# Altium PCB HV Box Connector Board.PcbDoc
Units mil, origin at the board's own origin, x right, y up, seen from the top; angles counter-clockwise.
Board outline 3937.01 x 3149.61 mil, 2 copper layers (Top Layer, Bottom Layer), stack 61.756 mil thick; 37 components, 41 nets, 144 pads, 416 vias.
Unrouted connection lines stored in the file: 1.
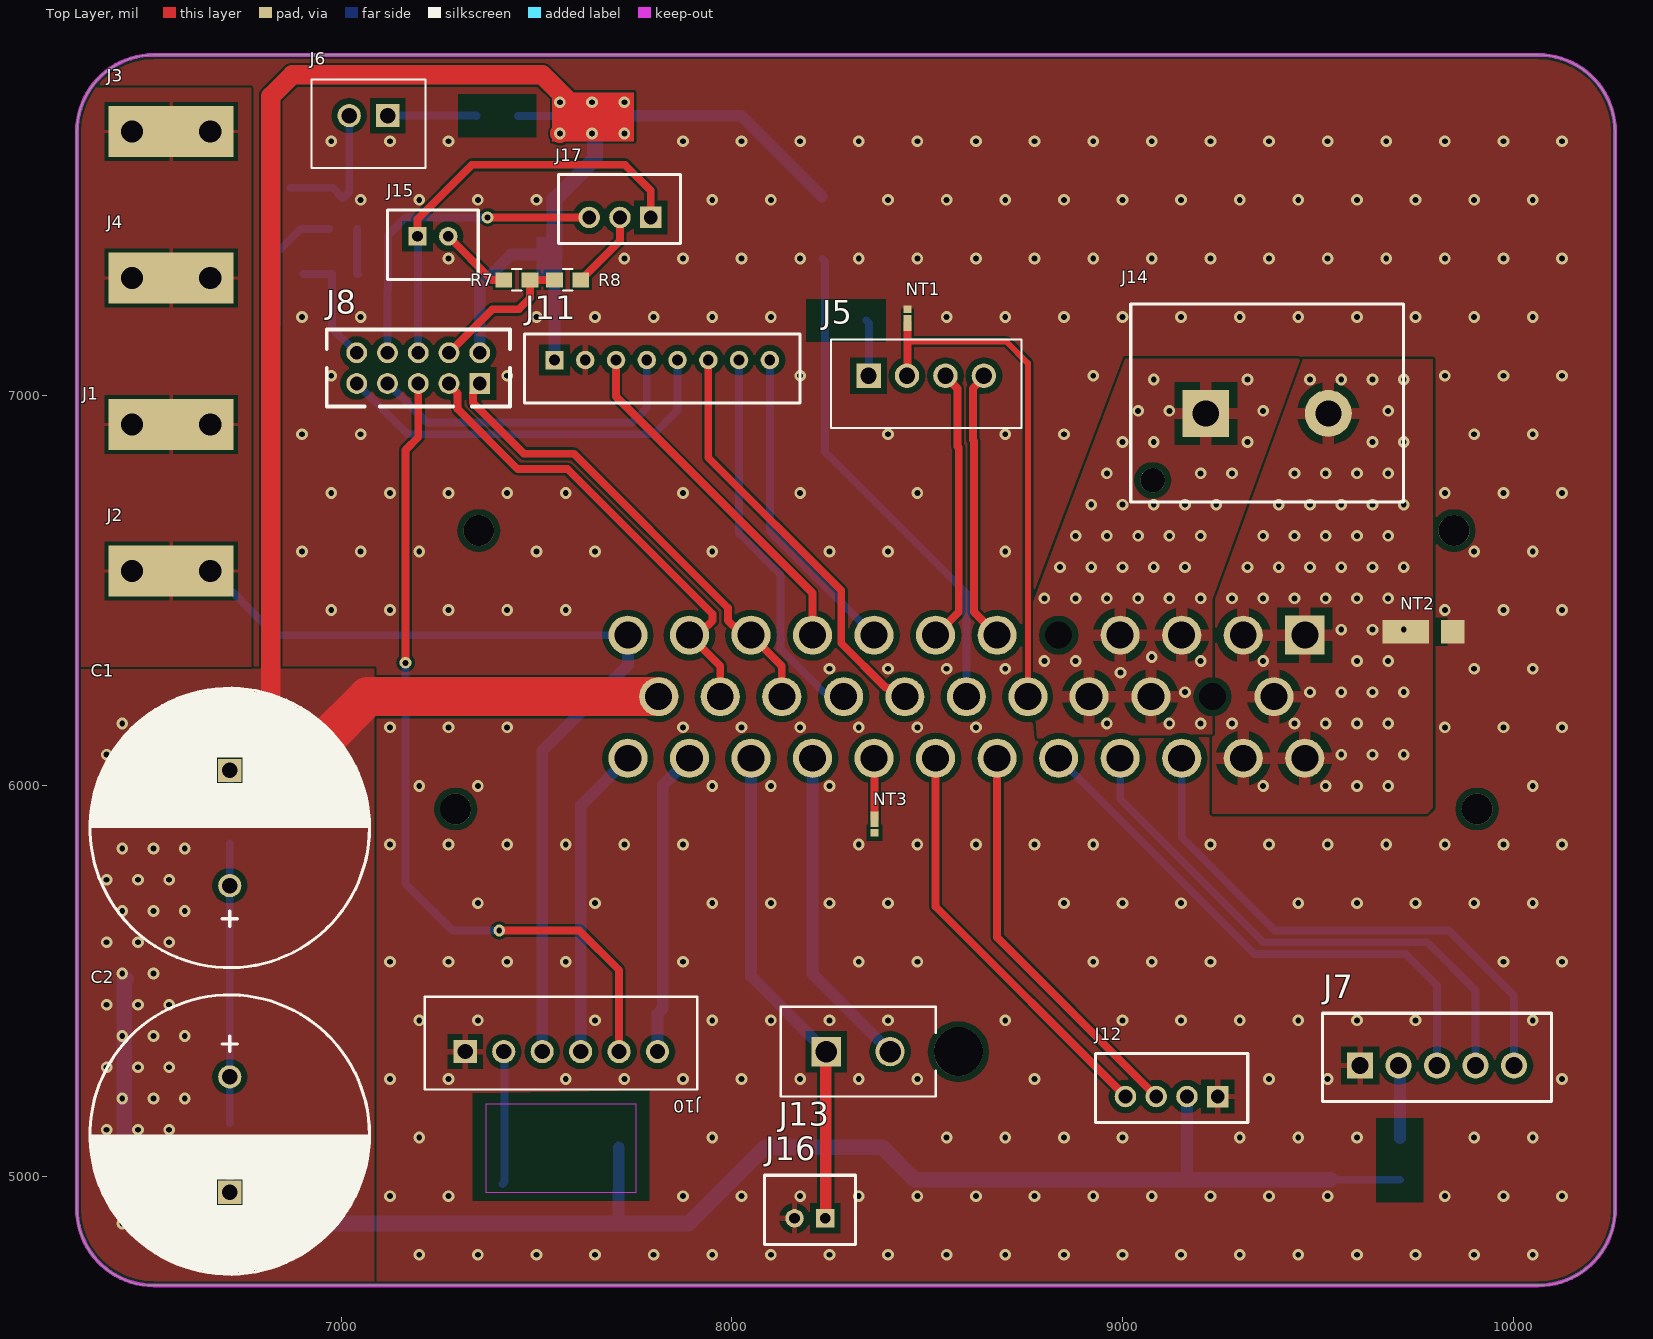
[diagram p0: Top Layer view]
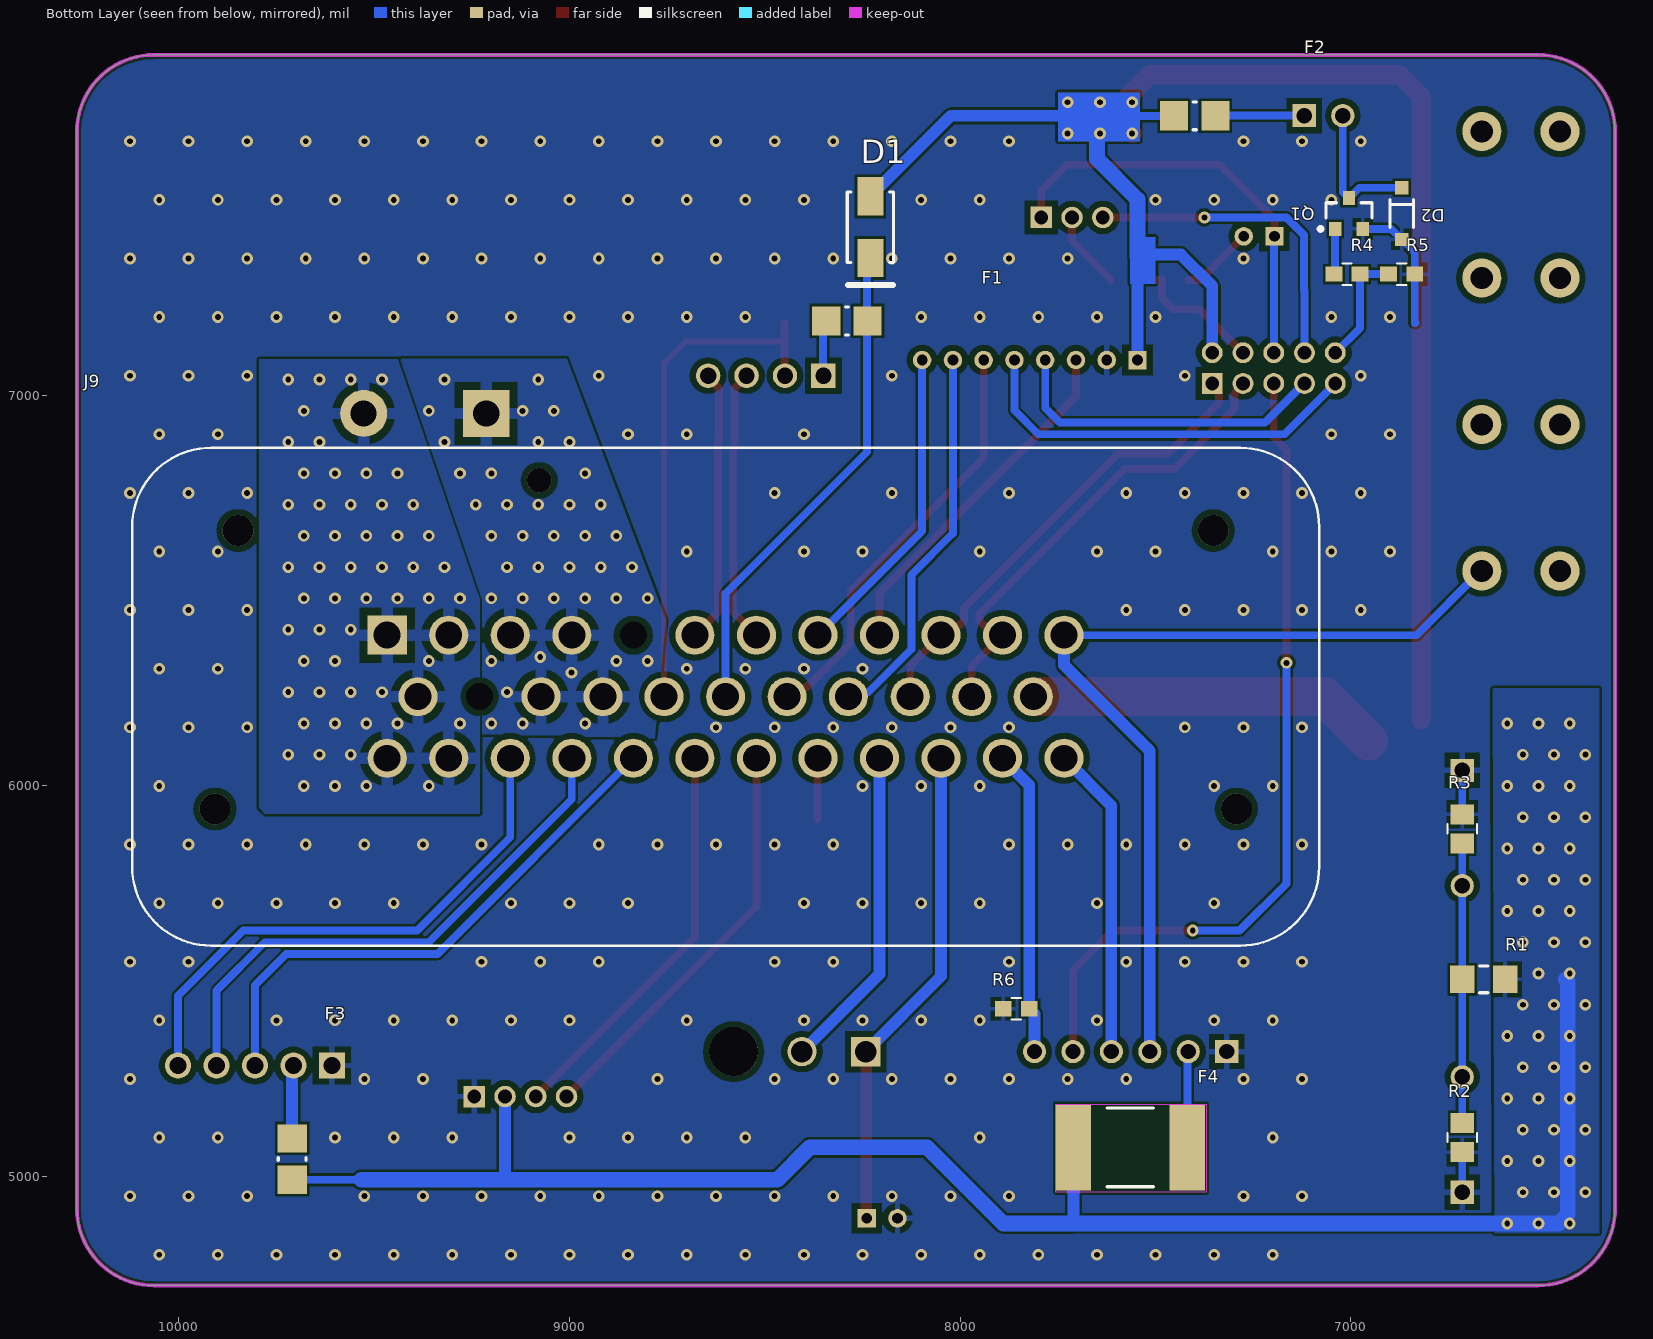
[diagram p1: Bottom Layer view, seen from below]
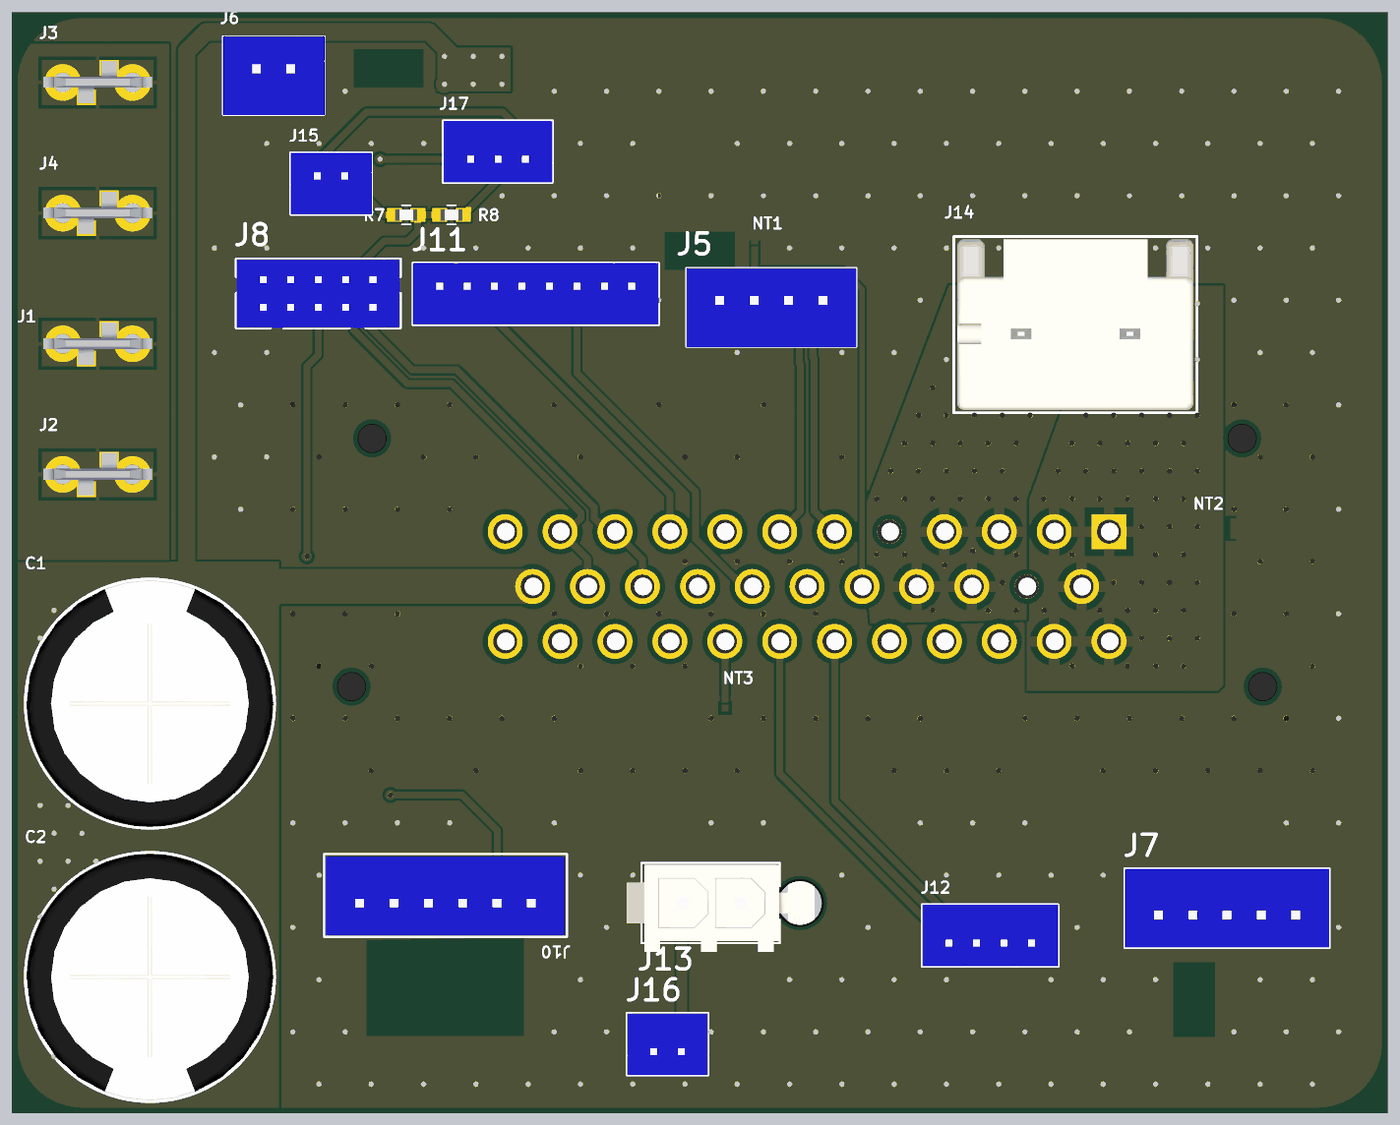
[diagram p2: 3D render of the assembled board from above, using the file's embedded part models]
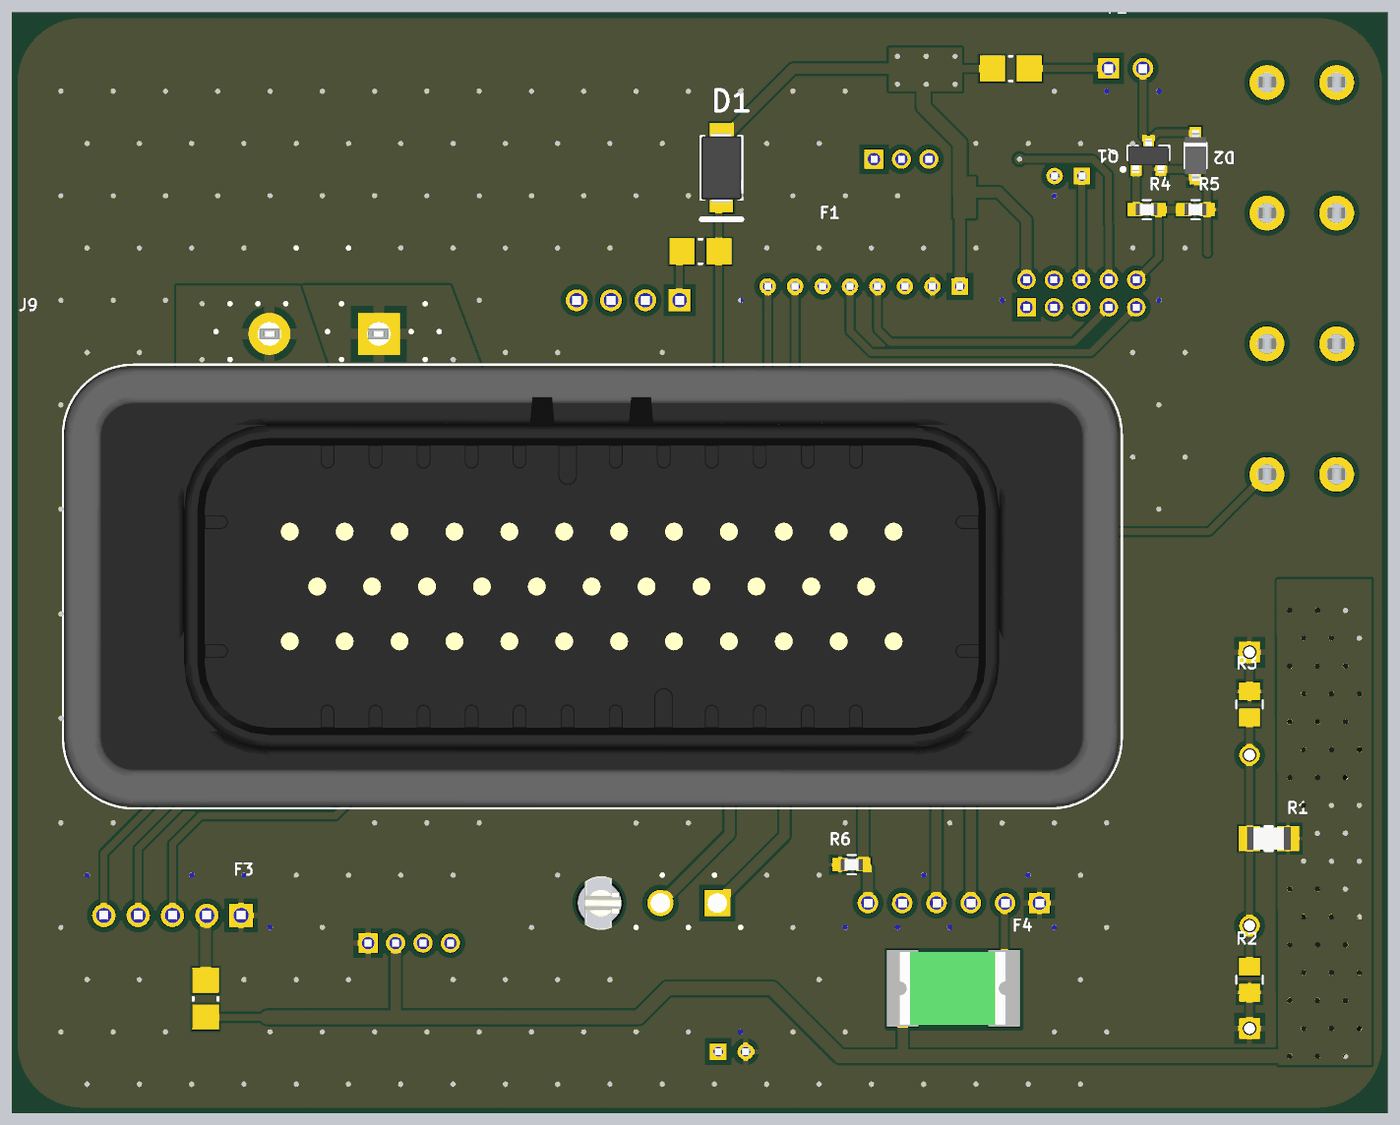
[diagram p3: 3D render of the assembled board from below, using the file's embedded part models]

## Layer stack, top to bottom
Top Solder: solder mask 1, SM-001, Dk 4
Top Layer: signal copper 1.378
Dielectric 1: core 59, Core-043, Dk 4.3
Bottom Layer: signal copper 1.378
Bottom Solder: solder mask 1, SM-001, Dk 4

## Board outline
6323.82,4918.31 ccw(c6520.67,4918.31) 6520.67,4721.46 10063.98,4721.46 ccw(c10063.98,4918.31) 10260.83,4918.31 10260.83,7674.21 ccw(c10063.98,7674.21) 10063.98,7871.06 6520.67,7871.06 ccw(c6520.67,7674.21) 6323.82,7674.21

## Design rules (kind name [scope] priority, off if disabled: settings)
AcuteAngle [All] p1: minimum=6.00000000000000E+0001 checktracksonly=FALSE
AssemblyTestPointUsage [All] p1: valid=2
AssemblyTestpoint [All] p1: testpointundercomponent=TRUE minsize=30 maxsize=100 preferedsize=60 minholesize=0 maxholesize=40 preferedholesize=32 testpointgrid=1 usegrid=FALSE gridtolerance=0.01 allowsidetop=TRUE allowsidebottom=TRUE
Clearance Clearance_1 [IsStitchingVia vs (OnLayer('Top Overlay'))] p1: gap=6 ignorepadtopadclearanceinfootprint=FALSE except(0: Arc-Hole Track-Hole SMDPad-Hole THPad-Hole Via-Hole Fill-Hole Poly-Hole Region-Hole Text-Hole; 10: Arc-THPad Arc-Text Track-THPad Track-Text SMDPad-THPad SMDPad-Text THPad-THPad THPad-Text Fill-Text Poly-Text Region-Text Text-Text; 15: Via-Text)
Clearance [All] p2: gap=6 ignorepadtopadclearanceinfootprint=FALSE except(0: Arc-Hole Track-Hole SMDPad-Hole THPad-Hole Via-Hole Fill-Hole Poly-Hole Region-Hole Text-Hole; 8: Via-Poly; 10: Arc-THPad Arc-Text Track-THPad Track-Text SMDPad-THPad SMDPad-Text THPad-THPad THPad-Via THPad-Fill THPad-Region THPad-Text Via-Text Fill-Text Poly-Text Region-Text Text-Text; 15: THPad-Poly)
ComponentClearance [All vs NOT HasFootprint('20MIL_TIE')] p1: gap=10 collisioncheckmode=3 verticalgap=10 showdistances=FALSE
DiffPairsRouting can [InDifferentialPairClass('CAN')] p1: maxlimit=19.08 minlimit=19.08 mostfreqgap=19.08 toplayer_minwidth=20 toplayer_maxwidth=20 toplayer_prefwidth=20 bottomlayer_minwidth=20 bottomlayer_maxwidth=20 bottomlayer_prefwidth=20 impedanceprofiledriven=TRUE impedanceprofileid={F46612D0-BBF3-4EEB-B16D-8B29CA681549} impedanceprofilevalue=120.000000 maxuncoupledlength=500
DiffPairsRouting [All] p2: maxlimit=10 minlimit=10 mostfreqgap=10 toplayer_minwidth=15 toplayer_maxwidth=15 toplayer_prefwidth=15 bottomlayer_minwidth=15 bottomlayer_maxwidth=15 bottomlayer_prefwidth=15 maxuncoupledlength=500
FabricationTestPointUsage [All] p1: valid=2 allowmultiple=FALSE
FabricationTestpoint [All] p1: side=3 testpointundercomponent=TRUE minsize=20 maxsize=100 preferedsize=60 minholesize=0 maxholesize=40 preferedholesize=32 testpointgrid=1 allowsidetop=TRUE allowsidebottom=TRUE usegrid=FALSE gridtolerance=0.01
Height [All] p1: minheight=0 maxheight=99999 prefheight=500
HoleSize [All] p1: absolutevalues=TRUE maxlimit=200 minlimit=7.87 maxpercent=80.000 minpercent=20.000
MinimumAnnularRing [All] p1: minimumring=3
MinimumSolderMaskSliver [All] p1: minsoldermaskwidth=1
PasteMaskExpansion PasteMaskExpansion_1 [IsSMTPin] p1: expansion=0
PasteMaskExpansion [All] p2: expansion=-1000
PolygonConnect PolygonConnect_1 [InPolygonClass('HIGHCUR')] p1: thpad.connectstyle=Relief thpad.reliefconductorwidth=30 thpad.reliefentries=4 thpad.polygonreliefangle="90 Angle" thpad.airgapwidth=20 smdpad.connectstyle=Relief smdpad.reliefconductorwidth=20 smdpad.reliefentries=4 smdpad.polygonreliefangle="90 Angle" smdpad.airgapwidth=15 via.connectstyle=Direct via.reliefconductorwidth=10 via.reliefentries=4 via.polygonreliefangle="90 Angle" via.airgapwidth=10 // HIGHCUR
PolygonConnect [All] p2: thpad.connectstyle=Relief thpad.reliefconductorwidth=15 thpad.reliefentries=4 thpad.polygonreliefangle="90 Angle" thpad.airgapwidth=15 smdpad.connectstyle=Relief smdpad.reliefconductorwidth=10 smdpad.reliefentries=4 smdpad.polygonreliefangle="90 Angle" smdpad.airgapwidth=10 via.connectstyle=Direct via.reliefconductorwidth=10 via.reliefentries=4 via.polygonreliefangle="90 Angle" via.airgapwidth=10
RoutingVias [Not InAnyComponent] p1: holewidth=15 width=30 viastyle="Through Hole" minholewidth=8.27 minwidth=15.75 maxholewidth=50 maxwidth=100
SMDToCorner [All] p1: distance=10000
SMDToPlane [All] p1: distance=200000
SilkToSolderMaskClearance [IsPad     or IsVia] p1: minsilkscreentomaskgap=1.8 clearancetoexposedcopper=TRUE
SolderMaskExpansion Via [IsVia] p1: expansion=4 istentingtop=TRUE
SolderMaskExpansion [All] p2: expansion=2.5 istentingtop=FALSE
Width Width_1 [InNetClass('PWR')] p1: maxlimit=80 minlimit=10 preferedwidth=20 minimp=50.000000 maximp=50.000000 favimp=50.000000
Width [All] p2: maxlimit=100 minlimit=8 preferedwidth=10 minimp=50.000000 maximp=50.000000 favimp=50.000000
19 further rules are at their usual default settings.

## Classes and differential pairs
polygon class HIGHCUR: +DCDC_L01_P001 +DCDC_L02_P006 PGND_L01_P007 PGND_L02_P000
net class MED_CUR: +GLV GND SHDN_IN SHDN_OUT
net class HIGH_CUR: +DCDC PGND
differential pair class CAN: CAN EM_D
differential pair CAN: +CAN_P -CAN_N
differential pair EM_D: +EM_D_P -EM_D_N

## Components (designator, comment, footprint, x,y, rotation, side; value= is the part's Value field where it differs from the comment)
C1 "URS1E222MHD" Nichicon_18x15 6715,6040 r270 top
C2 "URS1E222MHD" Nichicon_18x15 6715,4960 r90 top
D1 "B340A-13-F" DIOD-SMA-2_V 8230,7430 r270 bottom
D2 "1N4148W-E3-08" Vishay_1N4148W-E3-08 6870,7465 r270 bottom
F1 "610 mA PTC" 1206_FUSE_40H 8290,7190 r0 bottom
F2 "610 mA PTC" 1206_FUSE_40H 7400,7715 r180 bottom
F3 "610 mA PTC" 1206_FUSE_40H 9710,5045 r90 bottom
F4 "0ZCF0200AF2C" Bel_0ZCF0200AF2C_0 7565,5075 r180 bottom
J1 "1217861-1" te-1217861-1 6565,6925 r270 top
J2 "1217861-1" te-1217861-1 6565,6550 r270 top
J3 "1217861-1" te-1217861-1 6565,7675 r270 top
J4 "1217861-1" te-1217861-1 6565,7300 r270 top
J5 "B4B-XH-A(LF)(SN)" B4B-XH-A(LF)(SN) 8350,7050 r0 top
J6 "B2B-XH-A(LF)(SN)" B2B-XH-A(LF)(SN) 7070,7695 r180 top
J7 "B5B-XH-A(LF)(SN)" JST_B5B-XH-A_LF_SN_0 9805,5305 r0 top
J8 "B10B-PHDSS(LF)(SN)" B10B-PHDSS 7355,7030 r0 top
J9 "1-776231-1" TE_1-776231-1 9466.54,6385.83 r180 bottom locked
J10 "B6B-XH-A(LF)(SN)" CONN_B6B-XH-A(LF 7810,5320 r0 top
J11 "B8B-PH-K-S(LF)(SN)" B8B-PH-K 7821.85,7068.35 r180 top
J12 "B4B-PH-K-S(LF)(SN)" B4B-PH-K 9125.63,5226.65 r0 top
J13 "1-770872-0" CON2_1X2_P163_VM 8242.01,5320 r0 top value=Value
J14 "DF22-2P-7.92DSA(05)" DF22-2P-7.92DSA_05_0 9370,6980 r180 top
J15 "B2B-PH-K-S(LF)(SN)" JST_Sales_America_Inc._B2B-PH-K-S_LF_SN_0 7235,7385 r270 top
J16 "B2B-PH-K-S(LF)(SN)" JST_Sales_America_Inc._B2B-PH-K-S_LF_SN_0 8200,4915 r90 top
J17 "B3B-PH-K-S(LF)(SN)" B3B-PH-K 7713.74,7474.69 r0 top
NT1 "NET TIE" 20MIL_TIE 8450,7220 r270 top net-tie
NT2 "NET TIE" 60MIL_TIE 9845,6395 r180 top net-tie
NT3 "NET TIE" 20MIL_TIE 8365,5880 r90 top net-tie
Q1 "DMN3404L-7" SOT23-FET-DI 7005,7465 r90 bottom
R1 "RES 1206 2 1%" 1206_RES_28H 6660,5505 r180 bottom value=2
R2 "RES 0805 10M 1%" 0805_RES 6715,5100 r90 bottom value=10M
R3 "RES 0805 10M 1%" 0805_RES 6715,5890 r270 bottom value=10M
R4 "RES 0603 1K 1%" 0603_RES 7010,7310 r0 bottom value=1K
R5 "RES 0603 10K 1%" 0603_RES 6870,7310 r0 bottom value=10K
R6 "RES 0603 2.2K 1%" 0603_RES 7856.54,5430 r0 bottom value=2.2K
R7 "RES 0603 0 5%" 0603_RES 7450,7295 r180 top value=0
R8 "RES 0603 0 5%" 0603_RES 7580,7295 r180 top value=0

## Footprints (in the part's own frame and the unit in brackets; to place one, negate y for a bottom-side part, rotate by r counter-clockwise, add the part's x,y. Pads: shape width x height; smd on the part's side, far side on the other; paste and mask are expansions set on the pad)
20MIL_TIE [mil]
  rect 20x20 smd paste-100 mask-100: 1(0,0)
  rect 40x20 smd paste-100 mask-100: 2(35,0)
60MIL_TIE [mil]
  rect 60x60 smd paste-1000 mask+4: 1(0,0)
  rect 120x60 smd paste-1000 mask+4: 2(120,0)
0603_RES [mil]
  rect 43x39 smd: 1(-33.46,0) 2(33.46,0)
  silkscreen extent -12,-28 12,28, body extent -32,-19 32,19, height 34
0805_RES [mm]
  rect 1.3x1.5 smd: 1(-0.95,0) 2(0.95,0)
  silkscreen extent -0.3,-0.97 0.3,0.97, body extent -1.09,-0.7 1.09,0.7, height 1.1
1206_FUSE_40H [mil]
  rect 72x75 smd: 1(-53,0) 2(53,0)
  silkscreen extent -4,-35 4,35, body extent -69,-35 69,35, height 40
1206_RES_28H [mm]
  rect 1.6x1.8 smd: 1(-1.4,0) 2(1.4,0)
  silkscreen extent -0.27,-0.88 0.27,0.88, body extent -1.6,-0.83 1.6,0.83, height 0.71
B2B-XH-A(LF)(SN) [mm]
  rect 1.508x1.508 hole 1: 1(-1.25,-0.525)
  round 1.508 hole 1: 2(1.25,-0.525)
  silkscreen extent -3.7,-2.88 3.7,2.88, body extent -3.7,-2.87 3.7,2.88, height 7
B3B-PH-K [mm]
  rect 1.4x1.4 hole 0.9 paste-1000: 1(2,-0.5)
  round 1.4 hole 0.9 paste-1000: 2(0,-0.5) 3(-2,-0.5)
  silkscreen extent -4,-2.2 3.95,2.3, body extent -3.95,-2.2 3.95,2.3, height 6
B4B-PH-K [mm]
  rect 1.4x1.4 hole 0.9 paste-1000: 1(3,-0.55)
  round 1.4 hole 0.9 paste-1000: 2(1,-0.55) 3(-1,-0.55) 4(-3,-0.55)
  silkscreen extent -4.95,-2.25 4.95,2.25, body extent -4.95,-2.25 4.95,2.25, height 6
B4B-XH-A(LF)(SN) [mm]
  rect 1.59x1.59 hole 1.06 paste-25.4: 1(0,0)
  round 1.59 hole 1.06 paste-25.4: 2(2.5,0) 3(5,0) 4(7.5,0)
  silkscreen extent -2.45,-3.4 9.95,2.35, body extent -2.45,-3.4 9.95,2.35, height 7
B8B-PH-K [mm]
  rect 1.2x1.2 hole 0.7 paste-1000: 1(7,-0.55)
  round 1.2 hole 0.7 paste-1000: 2(5,-0.55) 3(3,-0.55) 4(1,-0.55) 5(-1,-0.55) 6(-3,-0.55) 7(-5,-0.55) 8(-7,-0.55)
  silkscreen extent -8.95,-2.25 8.95,2.25, body extent -8.95,-2.25 8.95,2.25, height 6
B10B-PHDSS [mm]
  rect 1.35x1.35 hole 0.9: 1(0,0)
  round 1.35 hole 0.9: 2(0,2) 3(-2,0) 4(-2,2) 5(-4,0) 6(-4,2) 7(-6,0) 8(-6,2) 9(-8,0) 10(-8,2)
  silkscreen extent -9.95,-1.5 1.98,3.5, body extent -9.95,-1.5 1.95,3.5, height 6.5
Bel_0ZCF0200AF2C_0 [mm]
  rect 2.3x5.6 smd paste+0: 1(-3.7,0) 2(3.7,0)
  Keep-Out Layer region: -4.826,2.794 4.953,2.794 4.953,-2.921 -4.826,-2.921
  silkscreen extent -1.5,-2.56 1.5,2.56, body extent -3.89,-2.65 3.81,2.65, height 1
CON2_1X2_P163_VM [mil]
  rect 75x75 hole 55: 1(0,0)
  round 75 hole 55: 2(162.99,0)
  round 125 hole 125 unplated mask+6.5: 3(338,0)
  silkscreen extent -117,-115 280,115, body extent -159,-140 380,110, height 566
CONN_B6B-XH-A(LF [mil]
  rect 59x59 hole 39: 1(-492.13,0)
  round 59 hole 39: 2(-393.7,0) 3(-295.28,0) 4(-196.85,0) 5(-98.43,0) 6(0,0)
  silkscreen extent -596,-97 101,141, body extent -590,-94 95,133, height 276
DF22-2P-7.92DSA_05_0 [mm]
  rect 3.048x3.048 hole 1.7 paste-1000 mask+0: 1(3.985,0.675)
  round 3.048 hole 1.7 paste-1000 mask+0: 2(-3.985,0.675)
  round 1.6 hole 1.6 unplated paste-1000 mask+0: M1(7.435,5.025)
  silkscreen extent -8.86,-6.43 8.86,6.43, body extent -8.61,-6.23 8.61,6.22, height 18.12
DIOD-SMA-2_V [mm] "Molded Diode, 2-Leads, Body 4.6x2.92mm"
  rect 2.5x1.7 smd: 1(-2,0) 2(2,0)
  silkscreen extent -2.3,-1.5 3.75,1.5, body extent -2.52,-1.46 2.52,1.46, height 2.4
JST_B5B-XH-A_LF_SN_0 [mm]
  rect 1.7x1.7 hole 1.1 paste-1000: 1(-5,-0.525)
  round 1.7 hole 1.1 paste-1000: 2(-2.5,-0.525) 3(0,-0.525) 4(2.5,-0.525) 5(5,-0.525)
  silkscreen extent -7.45,-2.88 7.45,2.88, body extent -7.45,-2.87 7.45,2.88, height 7
JST_Sales_America_Inc._B2B-PH-K-S_LF_SN_0 [mm]
  rect 1.2x1.2 hole 0.7 paste-1000: 1(-0.55,-1)
  round 1.2 hole 0.7 paste-1000: 2(-0.55,1)
  silkscreen extent -2.25,-2.95 2.25,2.95, body extent -2.25,-2.95 2.25,2.95, height 6
Nichicon_18x15 [mm]
  round 1.5 hole 1: 1(7.5,0)
  rect 1.5x1.5 hole 1: 2(0,0)
  silkscreen extent -5.33,-9.08 12.83,9.08, body extent -5.25,-9 12.75,9, height 15.02
SOT23-FET-DI [mm] "SOT23, 3-Leads, Body 2.90x2.40mm, Pitch 0.90mm, IPC Medium Density"
  rect 0.9x0.8 smd: 1(-1,0.9) 2(-1,-0.9) 3(1,0)
  silkscreen extent -1.12,-1.5 0.7,1.98, body extent -1.25,-1.5 1.25,1.5, height 1.1
te-1217861-1 [mil]
  round 100 hole 57: 1a(0,100) 1c(0,-100)
  rect 130x320 smd paste-39370.1 mask+4: 1b(0,0)
  body extent -61,-156 60,156, height 415
TE_1-776231-1 [mm]
  rect 2.54x2.54 hole 1.753 mask+0: 1(0,0)
  round 2.54 hole 1.753 mask+0: 2(4,0) 3(8,0) 4(12,0) 6(20,0) 7(24,0) 8(28,0) 9(32,0) 10(36,0) 11(40,0) 12(44,0) 13(2,-4) 15(10,-4) 16(14.025,-4) 17(18,-4) 18(22,-4) 19(26,-4) 20(29.975,-4) 21(34,-4) 22(38,-4) 23(42,-4) 24(0,-8) 25(4,-8) 26(8,-8) 27(12,-8) 28(16,-8) 29(20,-8) 30(24,-8) 31(28,-8) 32(32,-8) 33(36,-8) 34(40,-8) 35(44,-8)
  round 1.27 hole 1.753 mask+0: 5(16,0) 14(6,-4)
  round 2.007 hole 2.007 unplated: M1(-9.7,6.8) M2(53.7,6.8) M3(55.2,-11.3) M4(-11.2,-11.3)
  silkscreen extent -16.58,-20.18 60.58,12.18, body extent -16.5,-20.05 60.4,12.05, height 34.25
Vishay_1N4148W-E3-08 [mm]
  rect 0.85x0.85 smd: A(1.675,0) K(-1.675,0)
  silkscreen extent -0.9,-0.77 0.9,0.77, body extent -1.85,-0.77 1.85,0.77, height 1.26

## Part data
C1 C2: "2200µF 25V Aluminum Electrolytic Capacitors Radial, Can  2000 Hrs @ 85°C", Capacitance=2.2mF, Case/Package=Radial, Dielectric Material=Aluminium, Leakage Current=1.65mA, Manufacturer=Nichicon, Max Operating Temperature=85°C, Min Operating Temperature=-40°C, Package Quantity=50, Ripple Current=1.36A, Supplier Part Number 1=493-15903-ND, Tolerance=20%, Voltage Rating=25V, Category="Aluminum Electrolytic Capacitors", Diameter=18mm, Dissipation Factor=0.16%, Height=15mm, Height - Seated (Max)=0.65inch, Lead Diameter=0.8mm, Lead Free="Lead Free", Lead Pitch=7.5mm, Length=15mm, Life (Hours)=2000Hour, Manufacturer Part Number=URS1E222MHD, Mount="Through Hole", Number of Pins=2, Packaging=Bulk, Radiation Hardening=No, Supplier 1=Digi-Key, Termination=Radial, Voltage Rating (DC)=25V
D1: library part CMP-1667-00003-1, "Surface Mount Schottky Barrier Rectifier, 40 V, 3 A, -55 to 150 degC, 2-Pin SMA, RoHS, Tape and Reel", Case\Package=SMA, Forward Current="3 A", Forward Voltage="500 mV", Max Operating Temperature="125 degC", Max Surge Current="80 A", Min Operating Temperature="-55 degC", Package Quantity=5000, Peak Reverse Current="500 uA", ComponentLink1Description="Manufacturer URL", ComponentLink1URL=http://www.diodes.com/, ComponentLink2Description=Datasheet, ComponentLink2URL=http://www.diodes.com/_files/datasheets/ds30891.pdf, DatasheetVersion="Rev. 17 - 2, 09/2015", Elements=1, Height="2.1 mm", Length="4.6 mm", Mount="Surface Mount", Mounting Technology="Surface Mount", PackageDescription="2-Pin Surface Mounted Assembly, Body 4.3 x 2.605 mm, Height 2.4 mm", PackageReference=SMA-2, Packaging="Tape and Reel", Pins=2, Radiation Hardening=No, REACH SVHC="No SVHC", RoHSCompliant=true, Width="2.92 mm"
D2: "Diode Standard 75V 150mA Surface Mount SOD-123", Average Rectified Current=150mA, Forward Voltage=1.2V, Manufacturer=Vishay, Max Forward Surge Current (Ifsm)=2A, Max Operating Temperature=150°C, Max Power Dissipation=350mW, Max Repetitive Reverse Voltage (Vrrm)=100V, Max Reverse Leakage Current=5uA, Max Reverse Voltage (DC)=75V, Min Operating Temperature=-55°C, Package Quantity=3000, Peak Reverse Current=100uA, Supplier Part Number 1=70798350, Category="Rectifier Diodes", Contact Plating=Tin, Element Configuration=Single, Forward Current=150mA, Height=1.25mm, Lead Free="Lead Free", Length=2.85mm, Manufacturer Part Number=1N4148W-E3-08, Max Surge Current=2A, Mount="Surface Mount", Number of Pins=2, Packaging="Tape and Reel", Peak Non-Repetitive Surge Current=2A, Power Dissipation=350mW, Radiation Hardening=No, REACH SVHC=Unknown, Recovery Time=4ns, Reverse Recovery Time=4ns, Supplier 1="Allied Electronics", Weight=0.000363oz, Width=1.7mm
F1 F2 F3: library part NANOSMDC050F/13.2-2, "610 mA 13.2 VDC PTC resettable fuse 1206 footprint", Hold Current (mA)=610, Manufacturer=Tyco, Max Current (A)=100, Max Voltage (V)=13.2, PCB Package=1206, Resistance (max) (Ohms)=0.8, Resistance (min) (Ohms)=0.2, Trip Current (mA)=1240, ComponentLink1Description="Manufacturer Website", ComponentLink1URL=http://www.te.com.com, ComponentLink2Description="Component Datasheet", ComponentLink2URL=http://www.te.com/commerce/DocumentDelivery/DDEController?Action=showdoc&DocId=Catalog+Section%7FSURFACE-MOUNT%7FA1%7Fpdf%7FEnglish%7FENG_CS_SURFACE-MOUNT_A1.pdf%7FRF1411-000, ComponentLink3Description="Octopart Link", ComponentLink3URL=http://octopart.com/partsearch/#search/requestData&q=NANOSMDC050F/13.2-2, Description in Visual="Fuse Resettable SMT 610mA 13.2VDC 1206", Manufacturer P/N=NANOSMDC050F/13.2-2, P/N=NANOSMDC050F/13.2-2, Time to Trip (sec)=0.1
F4: "Polymeric PTC Resettable Fuse 24V 2A Ih Surface Mount 2920 (7351 Metric), Concave", Case Code (Imperial)=2920, Case Code (Metric)=7351, Hold Current=2A, Manufacturer=Bel, Max Current Rating=40A, Package Quantity=1, Supplier Part Number 1=507-1749-1-ND, Trip Current=4A, Category="PTC Resettable Fuses", Lead Free="Lead Free", Manufacturer Part Number=0ZCF0200AF2C, Packaging="Cut Tape", Supplier 1=Digi-Key, Time to Trip=5s
J1 J2 J3 J4: "CONN TAB .250 STR QC TIN PCB", Package Quantity=2000, Supplier Part Number 1=A100452CT-ND, Body Material=Brass, Body Plating=Tin, Contact Material=Brass, Contact Plating=Tin, Depth=7.92mm, ELV=Compliant, Gender=Male, Hole Diameter=0.055inch, Insulated Wire Support=Yes, Insulation=Non-Insulated, Lead Free="Lead Free", Length=0.552inch, Material=Brass, Mating Tab Width=0.25inch, Mount="Through Hole", Packaging="Tape and Reel", PCB Thickness=0.062inch, Plating=Tin, REACH SVHC=Unknown, Supplier 1=Digi-Key, Tab Length=0.352inch, Tab Thickness=0.032inch, Tab Width=0.25inch, Terminal Material=Brass, Termination=Tab
J5: "Connector Header Through Hole 4 position 0.098\" (2.50mm)", Manufacturer=JST, Supplier Part Number 1=73M9436, Datasheet Version=Apr-09, Manufacturer URL=http://www.jst.com/home2.html, No of Positions=4, Style/Orientation=StraightHeader/Plug, Supplier 1=Newark, Termination=Crimp, Type=ShroudedHeader
J6: "CONN HEADER VERT 2POS 2.5MM", Color=Natural, Contact Resistance=20mR, Current Rating=3A, Housing Color=White, Insulation Resistance=1GR, Manufacturer=JST, Max Operating Temperature=85°C, Max Voltage Rating (AC)=250V, Min Operating Temperature=-25°C, Supplier Part Number 1=73M9415, Category="FFC / FPC", Connector Type="Male Pin", Contact Material=Brass, Contact Plating=Tin,Copper,Lead, Depth=5.75mm, Fastening Type=Detent, Housing Material=Polyamide, Lead Free="Lead Free", Lead Pitch=2.5mm, Length=7.4mm, Manufacturer Part Number=B2B-XH-A(LF)(SN), Max Current Rating=3A, Max Voltage Rating (DC)=250V, Mount="Through Hole", Number of Contacts=2, Number of Positions=2, Number of Rows=1, Orientation=Straight, Packaging=Bulk, Pitch=2.5mm, REACH SVHC="No SVHC", Supplier 1=Newark, Termination=Solder, Voltage Rating=250V, Voltage Rating (AC)=250V, Wire/Cable Gauge=22AWG
J7: "Connector Header Through Hole 5 position 0.098\" (2.50mm)", Color=Natural, Contact Resistance=20mR, Current Rating=3A, Housing Color=White, Insulation Resistance=1GR, Manufacturer=JST, Max Operating Temperature=85°C, Max Voltage Rating (AC)=250V, Min Operating Temperature=-25°C, Supplier Part Number 1=73M9437, Category="Headers and Wire Housings", Connector Type="Male Pin", Contact Material=Brass, Contact Plating=Tin,Lead,Copper, Depth=5.75mm, Fastening Type=Detent, Gender=Male, Housing Material=Polyamide, Lead Free="Lead Free", Lead Pitch=2.5mm, Length=14.9mm, Manufacturer Part Number=B5B-XH-A(LF)(SN), Max Current Rating=3A, Mount="Through Hole", Number of Contacts=5, Number of Positions=5, Number of Rows=1, Orientation=Straight, Packaging=Bulk, Pitch=2.5mm, REACH SVHC="No SVHC", Supplier 1=Newark, Termination=Press-Fit, Voltage Rating=250V, Voltage Rating (AC)=250V, Wire/Cable Gauge=22AWG
J8: "Connector Header Through Hole 10 position 0.079\" (2.00mm)", Color=Natural, Contact Resistance=20mR, Current Rating=3A, Housing Color=Beige, Manufacturer=JST, Max Operating Temperature=85°C, Max Voltage Rating (AC)=250V, Min Operating Temperature=-25°C, Supplier Part Number 1=455-1762-ND, Category="Headers and Wire Housings", Connector Type="Male Pin", Contact Material="Copper Alloy,Tin", Contact Mating Length=0.114inch, Contact Plating=Tin,Copper, Depth=5mm, Fastening Type=Detent, Gender=Male, Height=9.5mm, Housing Material=Polyamide, Lead Free="Lead Free", Length=11.9mm, Manufacturer Part Number=B10B-PHDSS(LF)(SN), Max Current Rating=3A, Max Voltage Rating (DC)=250V, Mount="Through Hole", Number of Contacts=10, Number of Positions=10, Number of Rows=2, Orientation=Straight, Packaging=Bulk, Pitch=2mm, Row Spacing=0.079inch, Supplier 1=Digi-Key, Termination=Solder, Width=5mm
J9: "Connector Header Panel Mount, Through Hole 35 position 0.157\" (4.00mm)", Color=Black, Flammability Rating="UL94 V-0", Manufacturer="TE Connectivity", Max Operating Temperature=125°C, Max Voltage Rating (AC)=250V, Min Operating Temperature=-40°C, Package Quantity=220, Supplier Part Number 1=A104915-ND, Category="Headers and Wire Housings", Circuit Application=Power, Connector System=Wire-to-Device, Connector Type="Male Pin", Contact Material=Brass, Contact Plating=Gold, Depth=32.1mm, Fastening Type=Ramp, Gender=Male, Housing Material=Thermoplastic, Length=3.03inch, Manufacturer Part Number=1-776231-1, Mount="Through Hole,Panel", Number of Contacts=35, Number of Ports=1, Number of Positions=35, Number of Rows=3, Number of Signal Positions=35, Number of Terminals=35, Orientation=Straight, Packaging=Bulk, PCB Mount Alignment="Yes (With)", PCB Mount Retention=Without, PCB Thickness=0.062inch, Pitch=0.157inch, Radiation Hardening=No, Row Spacing=0.157inch, Sealable="Yes (With)", Shielding=Unshielded, Supplier 1=Digi-Key, Tab Thickness=1.3mm, Termination=Solder, Width=1.264inch
J10: "Connector Header Through Hole 6 position 0.098\" (2.50mm)", Color=Natural, Contact Resistance=20mR, Current Rating=3A, Housing Color=White, Insulation Resistance=1GR, Manufacturer=JST, Manufacturer Part Number=B6BXHA(LF)(SN), Max Operating Temperature=85°C, Max Voltage Rating (AC)=250V, Min Operating Temperature=-25°C, Package Quantity=500, Supplier Part Number 1=455-2271-ND, Category="FFC / FPC", Connector Type="Male Pin", Contact Material=Brass, Contact Plating=Tin,Lead,Copper, Depth=5.75mm, Housing Material=Polyamide, Lead Free="Lead Free", Lead Pitch=2.5mm, Length=17.4mm, Max Current Rating=3A, Max Voltage Rating (DC)=250V, Mount="Through Hole", Number of Contacts=6, Number of Positions=6, Number of Rows=1, Orientation=Straight, Packaging=Bulk, Pitch=2.5mm, REACH SVHC="No SVHC", Supplier 1=Digi-Key, Termination=Press-Fit, Voltage Rating=250V, Voltage Rating (AC)=250V, Wire/Cable Gauge=22AWG
J11: "Connector Header Through Hole 8 position 0.079\" (2.00mm)", Supplier Part Number 1=455-1710-ND, Supplier 1=Digi-Key
J12: "Male Header, Pitch 2 mm, 1 x 4 Position, Height 6 mm, Tail Length 3.4 mm, -25 to 85 degC, RoHS, Bulk", Manufacturer=JST, Supplier Part Number 1=37K9958, Datasheet URL=http://datasheet.octopart.com/B4B-PH-K-S%28LF%29%28SN%29-JST-datasheet-10558886.pdf, Datasheet Version=Apr-09, Manufacturer URL=http://www.jst.com/home2.html, No of Positions=4, Pitch=2mm, Style/Orientation=StraightHeader/Plug, Supplier 1=Newark, Termination=Crimp, Type=ShroudedHeader
J13: "Connector Header Through Hole 2 position 0.163\" (4.14mm)", Color=White, Contact Current Rating=9.5A, Flammability Rating="UL94 V-0", Manufacturer="TE Connectivity", Max Operating Temperature=221°C, Max Voltage Rating (AC)=600V, Min Operating Temperature=-67°C, Number of Power Positions=2, Package Quantity=200, Supplier Part Number 1=A32449-ND, Approvals=CSA, Built_By=EMA_UL_Team, Category=Connectors, Circuit Application=Power, Connector System=Wire-to-Board, Connector Type=Pin, Contact Gender=Male, Contact Material=Brass, Contact Plating=Tin, Contact Retention="No (Without)", Copyright="Copyright (C) 2018 Accelerated Designs. All rights reserved", Current Rating=9.5A, Depth=6.35mm, ELV=Compliant, Fastening Type=Ramp, Gender=Male, Height=13.49mm, Housing Color=White, Housing Material=Nylon, Lead Free="Lead Free", Length=9.83mm, Manufacturer Part Number=1-770872-0, Manufacturer_Part_Number=1-770872-0, Mating Alignment="Yes (With)", Mating Retention="Yes (With)", Mount="Through Hole", Number of Circuits=2, Number of Contacts=2, Number of Ports=1, Number of Positions=2, Number of Rows=1, Number of Terminals=2, Orientation=Straight, Packaging=Bag, PCB Mount Alignment="No (Without)", PCB Mount Retention=With, PCB Mounting Orientation=Vertical, PCB Thickness=0.062mm, Pitch=0.162inch, Plating Thickness=150um, Radiation Hardening=No, REACH SVHC=Unknown, RefDes=RefDes, Sealable="No (Without)", Strain Relief="No (Without)", Supplier 1=Digi-Key, Termination=Solder, Type=DEV, VDE Tested=Yes, Vendor="TE Connectivity", Voltage Rating=600V, Width=9.83mm
J14: "Connector Header Through Hole 2 position 0.312\" (7.92mm)", Color=Beige, Contact Resistance=5mR, Current Rating=25A, Housing Color=Natural, Manufacturer=Hirose, Max Operating Temperature=85°C, Max Voltage Rating (AC)=1kV, Min Operating Temperature=-35°C, Package Quantity=100, Supplier Part Number 1=H10714-ND, Voltage Rating=600V, Category="Headers and Wire Housings", Connector Type="Male Pin", Contact Material="Copper Alloy", Contact Mating Length=0.354inch, Contact Plating=Copper,Tin,Lead, Depth=12.45mm, Gender=Male, Housing Material=Polyamide, Lead Free="Lead Free", Length=17.22mm, Manufacturer Part Number=DF22-2P-7.92DSA(05), Mount="Through Hole", Number of Contacts=2, Number of Positions=2, Number of Rows=1, Orientation=Straight, Packaging=Bulk, Pitch=7.92mm, Radiation Hardening=No, REACH SVHC=Unknown, Supplier 1=Digi-Key, Termination=Solder
J15 J16: "Connector Header Through Hole 2 position 0.079\" (2.00mm)", Color=Natural, Contact Resistance=20mR, Current Rating=2A, Housing Color=White, Insulation Resistance=1MR, Manufacturer=JST, Manufacturer Part Number=B2BPHKSLFSN, Max Operating Temperature=85°C, Max Voltage Rating (AC)=100V, Min Operating Temperature=-25°C, Supplier Part Number 1=37K9940, Category=Connectors, Connector Type="Male Pin", Contact Material=Brass,Tin, Contact Mating Length=0.13inch, Contact Plating=Tin,Copper, Depth=4.5mm, Fastening Type=Detent, Gender=Male, Height=9.4mm, Housing Material=Polyamide, Lead Free="Lead Free", Lead Pitch=2mm, Length=5.9mm, Max Current Rating=2A, Max Voltage Rating (DC)=100V, Mount="Through Hole", Number of Contacts=2, Number of Pins=2, Number of Poles=2, Number of Positions=2, Number of Rows=1, Orientation=Straight, Packaging=Bulk, Pitch=2mm, REACH SVHC="No SVHC", Supplier 1=Newark, Supplier 2=Digi-Key, Supplier Part Number 2=455-1704-ND, Termination=Solder, Voltage Rating=100V, Voltage Rating (AC)=100V, Width=4.5mm, Working Voltage=100V
J17: "Connector Header Through Hole 3 position 0.079\" (2.00mm)", Color=Natural, Contact Resistance=20mR, Current Rating=2A, Housing Color=White, Insulation Resistance=1MR, Manufacturer=JST, Max Operating Temperature=85°C, Max Voltage Rating (AC)=100V, Min Operating Temperature=-25°C, Supplier Part Number 1="B3B-PH-K-S (LF)(SN)", Category="Headers and Wire Housings", Connector Type="Male Pin", Contact Material=Brass,Tin, Contact Mating Length=0.13inch, Contact Plating=Tin,Copper, Depth=4.5mm, Fastening Type=Detent, Gender=Male, Height=9.4mm, Housing Material=Polyamide, Lead Free="Lead Free", Lead Pitch=2mm, Length=7.9mm, Manufacturer Part Number=B3B-PH-K-S(LF)(SN), Max Current Rating=2A, Max Voltage Rating (DC)=100V, Mount="Through Hole", Number of Contacts=3, Number of Pins=3, Number of Poles=3, Number of Positions=3, Number of Rows=1, Orientation=Straight, Packaging=Bulk, Pitch=2mm, REACH SVHC="No SVHC", Supplier 1=Arrow, Termination=Solder, Voltage Rating=100V, Voltage Rating (AC)=100V, Width=4.5mm, Working Voltage=100V
NT1 NT2 NT3: "Net Tie (No BOM)"
Q1: "N-Channel 30V 5.8A (Ta) 720mW (Ta) Surface Mount SOT-23-3", Case/Package=SOT-23, Continuous Drain Current (ID)=5.8A, Drain to Source Breakdown Voltage=30V, Drain to Source Resistance=82mR, Gate to Source Voltage (Vgs)=20V, Input Capacitance=386pF, Manufacturer=Diodes, Max Operating Temperature=150°C, Max Power Dissipation=1.4W, Min Operating Temperature=-55°C, On-State Resistance=28mR, Package Quantity=3000, Supplier Part Number 1=DMN3404LDICT-ND, Threshold Voltage=1.5V, Category=MOSFETs, Contact Plating=Tin,Matte, Drain to Source Voltage (Vdss)=30V, Element Configuration=Single, Fall Time=6.18ns, Height=1mm, Lead Free="Lead Free", Length=2.9mm, Manufacturer Part Number=DMN3404L-7, Mount="Surface Mount", Nominal Vgs=1.5V, Number of Channels=1, Number of Elements=1, Number of Pins=3, Packaging="Tape and Reel", Power Dissipation=1.4W, Rds On Max=28mR, REACH SVHC="No SVHC", Rise Time=6.18ns, Supplier 1=Digi-Key, Turn-Off Delay Time=13.92ns, Turn-On Delay Time=3.41ns, Weight=0.000282oz, Width=1.3mm
R1: "Resistor Surface Mount, 2 Ohms, 1206 Footprint, 1% Tolerance 0.25W", Manufacturer=Various, PCB Package=1206, Power_Rating=0.25W, Tolerance=1%, Description in Visual="Res SMT 2 1206  1%  0.25W", Manufacturer P/N=Various, P/N="RES 1206 2 1%", Tol=1%, Val=2
R2 R3: "Resistor Surface Mount, 10M Ohms, 0805 Footprint, 1% Tolerance 0.125W", Manufacturer=Various, PCB Package=0805, Power_Rating=0.125W, Tolerance=1%, Description in Visual="Res SMT 10M 0805  1%  0.125W", Manufacturer P/N=Various, P/N="RES 0805 10M 1%", Tol=1%, Val=10M
R4: "Resistor Surface Mount, 1K Ohms, 0603 Footprint, 1% Tolerance 0.1W", Manufacturer=Various, PCB Package=0603, Power_Rating=0.1W, Tolerance=1%, Description in Visual="Res SMT 1K 0603  1%  0.1W", Manufacturer P/N=Various, P/N="RES 0603 1K 1%", Tol=1%, Val=1K
R5: "Resistor Surface Mount, 10K Ohms, 0603 Footprint, 1% Tolerance 0.1W", Manufacturer=Various, PCB Package=0603, Power_Rating=0.1W, Tolerance=1%, Description in Visual="Res SMT 10K 0603  1%  0.1W", Manufacturer P/N=Various, P/N="RES 0603 10K 1%", Tol=1%, Val=10K
R6: "Resistor Surface Mount, 2.2K Ohms, 0603 Footprint, 1% Tolerance 0.1W", Manufacturer=Various, PCB Package=0603, Power_Rating=0.1W, Tolerance=1%, Description in Visual="Res SMT 2.2K 0603  1%  0.1W", Manufacturer P/N=Various, P/N="RES 0603 2.2K 1%", Tol=1%, Val=2.2K
R7 R8: "Resistor Surface Mount, 0 Ohms, 0603 Footprint, 5% Tolerance 0.1W", Manufacturer=Various, PCB Package=0603, Power_Rating=0.1W, Tolerance=5%, Description in Visual="Res SMT 0 0603  5%  0.1W", Manufacturer P/N=Various, P/N="RES 0603 0 5%", Tol=5%, Val=0

## Via types
v1: diameter 30, hole 15, Top Layer to Bottom Layer, tented both sides, 416 vias

## Nets (pads, with @x,y where several pads share a name; then routed paths per layer and width w, separated by ;. In a path a pad name is that pad's centre, name@x,y a point inside that pad or via, vN(x,y) a via of type N, cw(c..) or ccw(c..) an arc to the next point about the centre after c; other vN are vias at no path point)
+5_BRAKE: J9.20 J11.7 | length 995.9
  Bottom Layer w20: J11.7 8018.7,6646.3 8125,6540 8125,6350 8235.43,6239.57 8275.21,6239.57 J9.20
+12_ANTIBROWNOUT: C1.1 C2.1 R1.1 R2.2 R3.2 | length 715.3
  Bottom Layer w20: R2.2 C2.1 6715,5504.88 R1.1 6715.12,5744.61 C1.1 R3.2
+DCDC: J9.3 J9.4 J9.15 J9.16 J14.1
  other v1: 8960,6160 9120,6160 9200,6160 9160,6240 8995,6290 8800,6320 8880,6320 9200,6320 9075,6330 8800,6480 8880,6480 8960,6480 9040,6480 9120,6480 9200,6480 8840,6560 8920,6560 9000,6560 9080,6560 9160,6560 8880,6640 8960,6640 9040,6640 9120,6640 9200,6640 8920,6720 9000,6720 9080,6720 9160,6720 9240,6720 8960,6800 9200,6800 9280,6800 9000,6880 9080,6880 9320,6880 9040,6960 9120,6960 9360,6960 9080,7040 9320,7040
+EM: D1.2 F1.1 J9.18 | length 1273.9
  Bottom Layer w20: D1.2@8231.3,7349.41 8238.34,7342.37 8238.34,7190.94 8238.34,6855.17 8600.39,6493.11 J9.18
+GLV: D1.1 F2.1 F3.1 F4.1 J8.2 J9.23 J11.1 J12.2 R1.2 | length 9581
  Top Layer w50: 6820,6170 6820,7765 6875,7820 7515,7820 7615,7720 ; v1(7560,7670) 7595,7705 7615,7705
  Top Layer w100: 6955,6115 7068.35,6228.35 J9.23
  Bottom Layer w20: F2.1 7545.39,7715 ; 9533,4992 F3.1
  Bottom Layer w30: J8.2 7355,7280 7435,7360 7541.26,7360 7546.26,7355 J11.1 ; v1@7650,7670 7650,7715 ; 7710,4875 7710,4880 7710,4965 7710.67,4965.67 F4.1 ; 7730,7715 8023.74,7715 D1.1 ; 9160,4992 9165,4997 J12.2
  Bottom Layer w40: 6450,5505 6445,5500 6445,5440 6445,5120 6445,4960 6445,4903.43 6468.43,4880 v1(6520,4880) v1(6600,4880) 7710,4880 7890,4880 8085,5075 8385,5075 8468,4992 9160,4992 9533,4992 ; 7546.26,7355 7546.26,7501.26 7650,7605 v1@7650,7670
  other v1: 6440,4880 6400,4960 6480,4960 6560,4960 6440,5040 6520,5040 6600,5040 6400,5120 6480,5120 6560,5120 6440,5200 6520,5200 6600,5200 6400,5280 6480,5280 6560,5280 6440,5360 6520,5360 6600,5360 6400,5440 6480,5440 6560,5440 6440,5520 6520,5520 6400,5600 6480,5600 6560,5600 6440,5680 6520,5680 6600,5680 6400,5760 6480,5760 6560,5760 6440,5840 6520,5840 6600,5840 6400,5920 6480,5920 6560,5920 6440,6000 6520,6000 6600,6000 6400,6080 6480,6080 6560,6080 6440,6160 6520,6160 6600,6160 7642.5,7670 7725,7670 7560,7750 7642.5,7750 7725,7750
BENDER_FUSED: F4.2 J10.2 | length 341.6
  Bottom Layer w20: F4.2@7413.39,4981.3 7418.31,4986.22 J10.2@7418.31,5320.87
BENDER_OK: J9.34 J10.6 R6.1 | length 784.7
  Bottom Layer w30: J10.6 7810,5416.93 R6.1 7823.07,6002.2 J9.34
BENDER_PWM: J8.5 J10.5 | length 2140.2
  Top Layer w20: v1(7165,6315) 7165,6860 7197.52,6892.52 J8.5 ; v1(7405,5630) 7610,5630 7711.57,5528.43 J10.5
  Bottom Layer w20: v1(7165,6315) 7165,5750 7285,5630 v1(7405,5630)
BRAKE_IN: J9.19 J11.6 | length 1085.4
  Top Layer w20: J11.6 7939.96,6840.04 8280,6500 8280,6365 8393.22,6251.78 8397.83,6251.78 8421.27,6228.35 J9.19
BRAKE_OUT: J9.9 J11.3 | length 912.5
  Top Layer w20: J11.3 7703.74,6996.53 8206.69,6493.57 J9.9
BSPD_FAULT: J8.7 J11.4 | length 843.2
  Bottom Layer w20: J8.7 7120,7030 7220,6930 7745,6930 7782.48,6967.48 J11.4
CAN_N: J8.1 J9.10 J9.21 | length 1227.3
  Top Layer w20: J8.1@7357.28,7032.48 7340.71,7015.91 7340.71,7007.44 7337.45,7004.19 7337.45,6980.91 7468.35,6850.01 7595.95,6850.01 7990.01,6455.95 7990.01,6423.2 8001.73,6411.48 8002.74,6411.48 8028.4,6385.83 J9.10 8127.95,6307.09 J9.21
CAN_P: J8.3 J9.11 J9.22 | length 1227.3
  Top Layer w20: J8.3@7278.54,7032.48 7278.54,7024.02 7298.37,7004.19 7298.37,6964.72 7452.16,6810.93 7579.76,6810.93 7950.93,6439.77 7950.93,6423.2 7939.22,6411.48 7938.2,6411.48 7912.55,6385.83 J9.11 7970.47,6307.09 J9.22
CHASS1: J1.1a J1.1b J1.1c J2.1a J2.1b J2.1c J3.1a J3.1b J3.1c J4.1a J4.1b J4.1c J9.12 J10.3 | length 2292.6
  Bottom Layer w20: J2.1a@6666.93,6551.18 6832.28,6385.83 J9.12
  Bottom Layer w30: J10.3 7514.72,6089.72 7734.25,6309.25 J9.12
CHASS2: J9.35 J10.4 | length 801
  Bottom Layer w30: J10.4 7613.15,5949.76 J9.35
CUR_OUT: J8.9 J11.5 | length 1029.2
  Bottom Layer w20: J8.9 7170.04,6900 7800,6900 7861.22,6961.22 J11.5
EM_D_N: J5.4 J9.6 | length 702.4
  Top Layer w20: J5.4@8646.65,7050.2 8646.65,7046.85 8616.98,7017.18 8616.98,6885.32 8619.94,6882.37 8619.94,6445.03 J9.6
EM_D_P: J5.3 J9.7 | length 702.4
  Top Layer w20: J9.7 8580.85,6445.03 8580.85,6866.18 8577.9,6869.14 8577.9,7017.18 8548.23,7046.85 J5.3@8548.23,7050.2
EM_FUSED: F1.2 J5.1 | length 143.7
  Bottom Layer w20: F1.2@8344.34,7190.94 8351.38,7183.91 J5.1@8351.38,7050.2
EXT_NTC_N: J15.2 R7.2 | length 191.1
  Top Layer w20: J15.2 7386.02,7295 R7.2
  Bottom Layer w20: J15.2 J15.2@7275.31,7405.71 ; J15.2@7276.57,7405.51 J15.2@7277.56,7404.53
FAN2+: F2.2 J6.1 | length 228.1
  Bottom Layer w20: J6.1 7346.33,7715.67 F2.2
FAN2-: D2.K J6.2 Q1.3 | length 363.8
  Bottom Layer w20: D2.K 6978.43,7530.94 Q1.3 7020.79,7520.16 J6.2
FAN2_PWM: J8.10 R4.1 R5.2 | length 300.6
  Bottom Layer w20: R5.2 R4.1 6976.54,7172.24 J8.10
GND: C1.2 C2.2 D2.A J7.1 J10.1 J11.2 J12.1 J16.2 NT1.1 NT2.1 NT3.1 Q1.2 R2.1 R3.1 R5.1 R6.2 | length 555.2
  Bottom Layer w20: C2.2 R2.1 ; R3.1 C1.2 ; 6835,7185 6836.54,7185 R5.1 6836.54,7365.59 D2.A 6896.57,7425.63 Q1.2
  other v1: 7200,4800 7350,4800 7500,4800 7650,4800 7800,4800 7950,4800 8100,4800 8250,4800 8400,4800 8550,4800 8700,4800 8850,4800 9000,4800 9150,4800 9300,4800 9450,4800 9600,4800 9750,4800 9900,4800 10050,4800 7125,4950 7275,4950 7875,4950 8025,4950 8175,4950 8325,4950 8475,4950 8625,4950 8775,4950 8925,4950 9075,4950 9225,4950 9375,4950 9525,4950 9825,4950 9975,4950 10125,4950 7200,5100 7950,5100 8550,5100 8700,5100 8850,5100 9000,5100 9300,5100 9450,5100 9600,5100 9900,5100 10050,5100 7125,5250 7275,5250 7575,5250 7725,5250 7875,5250 8025,5250 8175,5250 8325,5250 8475,5250 8775,5250 9375,5250 9525,5250 10125,5250 7200,5400 7350,5400 7650,5400 7950,5400 8100,5400 8250,5400 8400,5400 8700,5400 9000,5400 9150,5400 9300,5400 9450,5400 9600,5400 9750,5400 10050,5400 7125,5550 7275,5550 7425,5550 7575,5550 7875,5550 8325,5550 8475,5550 8925,5550 9075,5550 9225,5550 9975,5550 10125,5550 7350,5700 7650,5700 7950,5700 8100,5700 8250,5700 8400,5700 8850,5700 9000,5700 9150,5700 9450,5700 9600,5700 9750,5700 9900,5700 10050,5700 7125,5850 7275,5850 7425,5850 7575,5850 7725,5850 7875,5850 8325,5850 8475,5850 8625,5850 8775,5850 8925,5850 9225,5850 9375,5850 9525,5850 9675,5850 9825,5850 9975,5850 10125,5850 7200,6000 7350,6000 7950,6000 8100,6000 8250,6000 10050,6000 7125,6150 7275,6150 7425,6150 7875,6150 8025,6150 8175,6150 8325,6150 8475,6150 8625,6150 9825,6150 9975,6150 10125,6150 8250,6300 8400,6300 8550,6300 8700,6300 9900,6300 10050,6300 6975,6450 7125,6450 7275,6450 7425,6450 7575,6450 9825,6450 9975,6450 10125,6450 6900,6600 7050,6600 7200,6600 7500,6600 7650,6600 7950,6600 8250,6600 8400,6600 8700,6600 9900,6600 10050,6600 6975,6750 7125,6750 7275,6750 7425,6750 7575,6750 7875,6750 8175,6750 8475,6750 9825,6750 9975,6750 10125,6750 6900,6900 7050,6900 8400,6900 8700,6900 8850,6900 9900,6900 10050,6900 6975,7050 7425,7050 8175,7050 8925,7050 9825,7050 9975,7050 10125,7050 6900,7200 7050,7200 7500,7200 7650,7200 7800,7200 7950,7200 8100,7200 8550,7200 8700,7200 8850,7200 9000,7200 9150,7200 9300,7200 9450,7200 9600,7200 9750,7200 9900,7200 10050,7200 7275,7350 7725,7350 7875,7350 8025,7350 8175,7350 8325,7350 8475,7350 8625,7350 8775,7350 8925,7350 9075,7350 9225,7350 9375,7350 9525,7350 9675,7350 9825,7350 9975,7350 10125,7350 7050,7500 7200,7500 7350,7500 7500,7500 7950,7500 8100,7500 8400,7500 8550,7500 8700,7500 8850,7500 9000,7500 9150,7500 9300,7500 9450,7500 9600,7500 9750,7500 9900,7500 10050,7500 6975,7650 7125,7650 7275,7650 7875,7650 8025,7650 8175,7650 8325,7650 8475,7650 8625,7650 8775,7650 8925,7650 9075,7650 9225,7650 9375,7650 9525,7650 9675,7650 9825,7650 9975,7650 10125,7650
GND_BRAKE: J9.8 J11.8 | length 814.7
  Bottom Layer w20: J11.8 8097.44,6652.56 J9.8
GND_EM: J5.2 J9.17 NT1.2 | length 1327.5
  Top Layer w15: 8450,7140 8452.5,7137.5 8702.5,7137.5 8757.87,7082.13 J9.17
  Top Layer w20: J5.2@8446.36,7046.75 8449.8,7050.2 J5.2@8448.82,7051.18 ; J5.2 8450,7051.57 8450,7140 NT1.2
HECS1: J7.3 J9.28 | length 1414.7
  Bottom Layer w20: J9.28 9337.48,5570 9725,5570 9805,5490 J7.3
HECS2: J7.4 J9.27 | length 1409.2
  Bottom Layer w20: J9.27 8994.09,5965.91 9360,5600 9780,5600 9903.43,5476.57 J7.4
HECS3: J7.5 J9.26 | length 1399.4
  Bottom Layer w20: J9.26 9151.57,5868.43 9390,5630 9835,5630 10001.85,5463.15 J7.5
HECS+: F3.2 J7.2 | length 187.7
  Bottom Layer w30: J7.2 9710,5280.91 F3.2
NetQ1_1: Q1.1 R4.2 | length 116.9
  Bottom Layer w20: Q1.1 7040.43,7313.03 R4.2
NTC_N: J8.4 R7.1 R8.2 | length 374.7
  Top Layer w20: J8.4 7387.52,7220 7455,7220 7483.46,7248.46 R7.1 R8.2
NTC_P: J8.6 J15.1 J17.1 | length 1096.3
  Top Layer w20: J15.1 7195.63,7450.63 7335,7590 7726.38,7590 7792.48,7523.9 J17.1
  Bottom Layer w20: J15.1 7196.57,7405.71 7196.57,7109.69 J8.6 ; J15.1@7197.83,7405.51 J15.1@7198.82,7404.53 ; J8.6@7198.82,7112.2 J8.6@7199.8,7111.22
PGND: J9.1 J9.2 J9.13 J9.24 J9.25 J14.2 NT2.2
  other v1: 9360,6000 9520,6000 9600,6000 9680,6000 9560,6080 9640,6080 9720,6080 9280,6160 9440,6160 9520,6160 9600,6160 9680,6160 9480,6240 9560,6240 9640,6240 9720,6240 9360,6320 9600,6320 9680,6320 9560,6400 9640,6400 9720,6400 9280,6480 9360,6480 9440,6480 9520,6480 9600,6480 9680,6480 9320,6560 9400,6560 9480,6560 9560,6560 9640,6560 9720,6560 9360,6640 9440,6640 9520,6640 9600,6640 9680,6640 9400,6720 9480,6720 9560,6720 9640,6720 9720,6720 9440,6800 9520,6800 9600,6800 9680,6800 9640,6880 9720,6880 9680,6960 9480,7040 9560,7040 9640,7040 9720,7040
SHDN_IN: J9.32 J13.2 | length 833
  Bottom Layer w30: J9.32 8206.69,5518.31 J13.2
SHDN_OUT: J9.33 J13.1 J16.1 | length 1262.2
  Top Layer w30: J16.1 8240.69,4894.67 8240.69,5318.68 J13.1
  Bottom Layer w30: J9.33 8049.21,5512.8 J13.1 J13.1@8240.69,5318.68 ; J16.1 J16.1@8240.69,4894.67
TS_DETECT: J8.8 J17.3 | length 835.4
  Top Layer w20: v1(7375,7455) J17.3
  Bottom Layer w20: J8.8 7118.78,7268.25 7120,7269.47 7120,7410 7165,7455 v1(7375,7455)
TSAL_GND: J9.31 NT3.2 | length 156.2
  Top Layer w20: J9.31 8365,6070.04 NT3.2
TSAL_GREEN+: J9.30 J12.4 | length 1067.1
  Top Layer w20: J9.30 8521.65,5690.87 J12.4
TSAL_NTC_N: J17.2 R8.1 | length 201.5
  Top Layer w20: R8.1 7713.74,7395.28 J17.2
TSAL_RED+: J9.29 J12.3 | length 1034.5
  Top Layer w20: J9.29 8679.13,5612.13 J12.3
pads on no net: J9.5 J9.14 J9.M1 J9.M2 J9.M3 J9.M4 J13.3 J14.M1

## Polygon pours and split planes (outlines as drawn)
GND on Top Layer "GND_L01_P009" (solid, pour order 9): 6323.82,4918.31 ccw(c6520.67,4918.31) 6520.67,4721.46 10063.98,4721.46 ccw(c10063.98,4918.31) 10260.83,4918.31 10260.83,7674.21 ccw(c10063.98,7674.21) 10063.98,7871.06 6520.67,7871.06 ccw(c6520.67,7674.21) 6323.82,7674.21
PGND on Top Layer "PGND_L01_P007" (solid, pour order 7): 9230.32,5929.13 9779.53,5929.13 9794.31,5943.92 9794.31,7092.52 9439.57,7092.52 9230.32,6478.35 9230.32,6241.37
+GLV on Top Layer "+GLV_L01_P005" (solid, pour order 5): 7085,6300 7085,4721.46 6520.67,4721.46 cw(c6514.22,4911.85) 6323.82,4905.4 6323.82,6300
CHASS1 on Top Layer "CHASS1_L01_P003" (solid, pour order 3): 6323.9,7786.42 6769.68,7786.42 6769.69,6305 6322.79,6305
+DCDC on Top Layer "+DCDC_L01_P001" (solid, pour order 1): 9454.88,7093.5 9230.31,6478.35 9230.31,6132.87 8781.5,6122.05 8753.94,6425.2 9007.68,7093.5
GND on Bottom Layer "GND_L02_P010" (solid, pour order 10): 6323.82,4918.31 ccw(c6520.67,4918.31) 6520.67,4721.46 10063.98,4721.46 ccw(c10063.98,4918.31) 10260.83,4918.31 10260.83,7674.21 ccw(c10063.98,7674.21) 10063.98,7871.06 6520.67,7871.06 ccw(c6520.67,7674.21) 6323.82,7674.21
PGND on Bottom Layer "PGND_L02_P000" (solid, pour order 0): 9230.32,5929.13 9779.53,5929.13 9794.31,5943.92 9794.31,7092.52 9439.57,7092.52 9230.32,6478.35 9230.32,6241.37
+DCDC on Bottom Layer "+DCDC_L02_P006" (solid, pour order 6): 9454.88,7093.5 9230.31,6478.35 9230.31,6132.87 8781.5,6122.05 8753.94,6425.2 9007.68,7093.5
+GLV on Bottom Layer "+GLV_L02_P004" (solid, pour order 4): 6637.51,6250 6365,6250 6365,4855 6632.51,4855

## Keep-outs
Keep-Out Layer:
  the board outline again, w10

## Other copper
Top Layer:
  rectangle net +GLV: 7540,7650 7750,7775
  pour cut-out: 9770,5150 9650,5150 9650,4935 9770,4935
  pour cut-out: 7500,7770 7500,7660 7300,7660 7300,7770
  pour cut-out: 7336.61,5213.37 7336.61,4937.99 7788.39,4937.99 7788.39,5221.46 7787.4,5221.46
  pour cut-out: 8190.94,7246.06 8190.94,7136.81 8393.7,7136.81 8393.7,7247.05
Bottom Layer:
  rectangle net +GLV: 7500,7285 7565,7405
  rectangle net +GLV: 7540,7650 7750,7775

## Silkscreen, mask and mechanical layers (free items; w line width, h text height)
Board:
  the board outline again, w10

## Dimensions
6520.67,7871.06 to 7085,4721.46 on Bottom Component Outline
6323.82,6300 to 10260.83,4918.31 on Bottom Component Outline

## Text inside footprints (layer, text, board x,y; h text height)
F1: Bottom Component Outline "3.  JB 121013 CHANGED LIBRARY NOTE TO CLEAR COPPER ON ALL LAYERS UNDER PTC FUSE AND ADDED NOTE AVOID VIA-IN-PAD AND THERMALS." at 8194,7145 h1 r180; Bottom Component Outline "2. JB 082813 ADDED DESIGNER NOTE CLEAR COPPER UNDER FUSE." at 8194,7143 h1 r180; Bottom Component Outline "1. MT 021711, STANDARD 1206 FUSE F/P WITH 40MIL HEIGHT UP TO 500V." at 8194,7141 h1 r180; Bottom Component Outline "LOCATION: SURFACEMOUNT2LEAD.PCBLIB" at 8194,7139 h1 r180; Bottom Component Center "AND THERMALS" at 8145,7320 h25 r180; Bottom Component Center "FUSE AND AVOID VIA-IN-PAD" at 7990,7285 h25 r180; Bottom Component Center "COPPER ON ALL LAYERS UNDER" at 7975,7120 h25 r180; Bottom Component Center "ON PTC FUSE ONLY: CLEAR" at 8020,7085 h25 r180
F2: Bottom Component Outline "3.  JB 121013 CHANGED LIBRARY NOTE TO CLEAR COPPER ON ALL LAYERS UNDER PTC FUSE AND ADDED NOTE AVOID VIA-IN-PAD AND THERMALS." at 7496,7760 h1; Bottom Component Outline "2. JB 082813 ADDED DESIGNER NOTE CLEAR COPPER UNDER FUSE." at 7496,7762 h1; Bottom Component Outline "1. MT 021711, STANDARD 1206 FUSE F/P WITH 40MIL HEIGHT UP TO 500V." at 7496,7764 h1; Bottom Component Outline "LOCATION: SURFACEMOUNT2LEAD.PCBLIB" at 7496,7766 h1; Bottom Component Center "AND THERMALS" at 7545,7585 h25; Bottom Component Center "FUSE AND AVOID VIA-IN-PAD" at 7700,7620 h25; Bottom Component Center "COPPER ON ALL LAYERS UNDER" at 7715,7785 h25; Bottom Component Center "ON PTC FUSE ONLY: CLEAR" at 7670,7820 h25
F3: Bottom Component Outline "3.  JB 121013 CHANGED LIBRARY NOTE TO CLEAR COPPER ON ALL LAYERS UNDER PTC FUSE AND ADDED NOTE AVOID VIA-IN-PAD AND THERMALS." at 9755,4949 h1 r270; Bottom Component Outline "2. JB 082813 ADDED DESIGNER NOTE CLEAR COPPER UNDER FUSE." at 9757,4949 h1 r270; Bottom Component Outline "1. MT 021711, STANDARD 1206 FUSE F/P WITH 40MIL HEIGHT UP TO 500V." at 9759,4949 h1 r270; Bottom Component Outline "LOCATION: SURFACEMOUNT2LEAD.PCBLIB" at 9761,4949 h1 r270; Bottom Component Center "AND THERMALS" at 9580,4900 h25 r270; Bottom Component Center "FUSE AND AVOID VIA-IN-PAD" at 9615,4745 h25 r270; Bottom Component Center "COPPER ON ALL LAYERS UNDER" at 9780,4730 h25 r270; Bottom Component Center "ON PTC FUSE ONLY: CLEAR" at 9815,4775 h25 r270
R1: Bottom Component Outline "LOCATION: SURFACEMAUNT2LEADS.PCBLIB" at 6746.8,5546.8 h1; Bottom Component Outline "HISTORY: MT/PE 081810, CREATED FROM 1206_RES FOOTPRINT. 28MIL HEIGHT FOR LOWER PROFILE 1206 RESISTORS." at 6746.8,5545.3 h1
R2: Bottom Component Outline "2. SS 102512, ADDED SILKSCREEN." at 6749,5033 h1 r270; Bottom Component Outline "LOCATION: SURFACEMOUNT2LEAD.PCBLIB" at 6753,5033 h1 r270; Bottom Component Outline "HISTORY: MT 021711, OLDER FOOTPRINT. STANDARD MAX HEIGHT 1.1MM" at 6751,5033 h1 r270
R3: Bottom Component Outline "2. SS 102512, ADDED SILKSCREEN." at 6681,5957 h1 r90; Bottom Component Outline "LOCATION: SURFACEMOUNT2LEAD.PCBLIB" at 6677,5957 h1 r90; Bottom Component Outline "HISTORY: MT 021711, OLDER FOOTPRINT. STANDARD MAX HEIGHT 1.1MM" at 6679,5957 h1 r90
R4: Bottom Component Outline "SS 102512, ADDED SILKSCREEN." at 6953,7284 h1 r180
R5: Bottom Component Outline "SS 102512, ADDED SILKSCREEN." at 6813,7284 h1 r180
R6: Bottom Component Outline "SS 102512, ADDED SILKSCREEN." at 7799.54,5404 h1 r180
R7: Top Component Outline "SS 102512, ADDED SILKSCREEN." at 7507,7269 h1 r180
R8: Top Component Outline "SS 102512, ADDED SILKSCREEN." at 7637,7269 h1 r180